# Altium PCB GARY_MIDI_CV_Converter.PcbDoc
Units mm, origin at the board's own origin, x right, y up, seen from the top; angles counter-clockwise.
Board outline 70.2 x 110 mm, 2 copper layers (Top Layer, Bottom Layer); 87 components, 71 nets, 370 pads, 3 vias.
Unrouted connection lines stored in the file: 76.
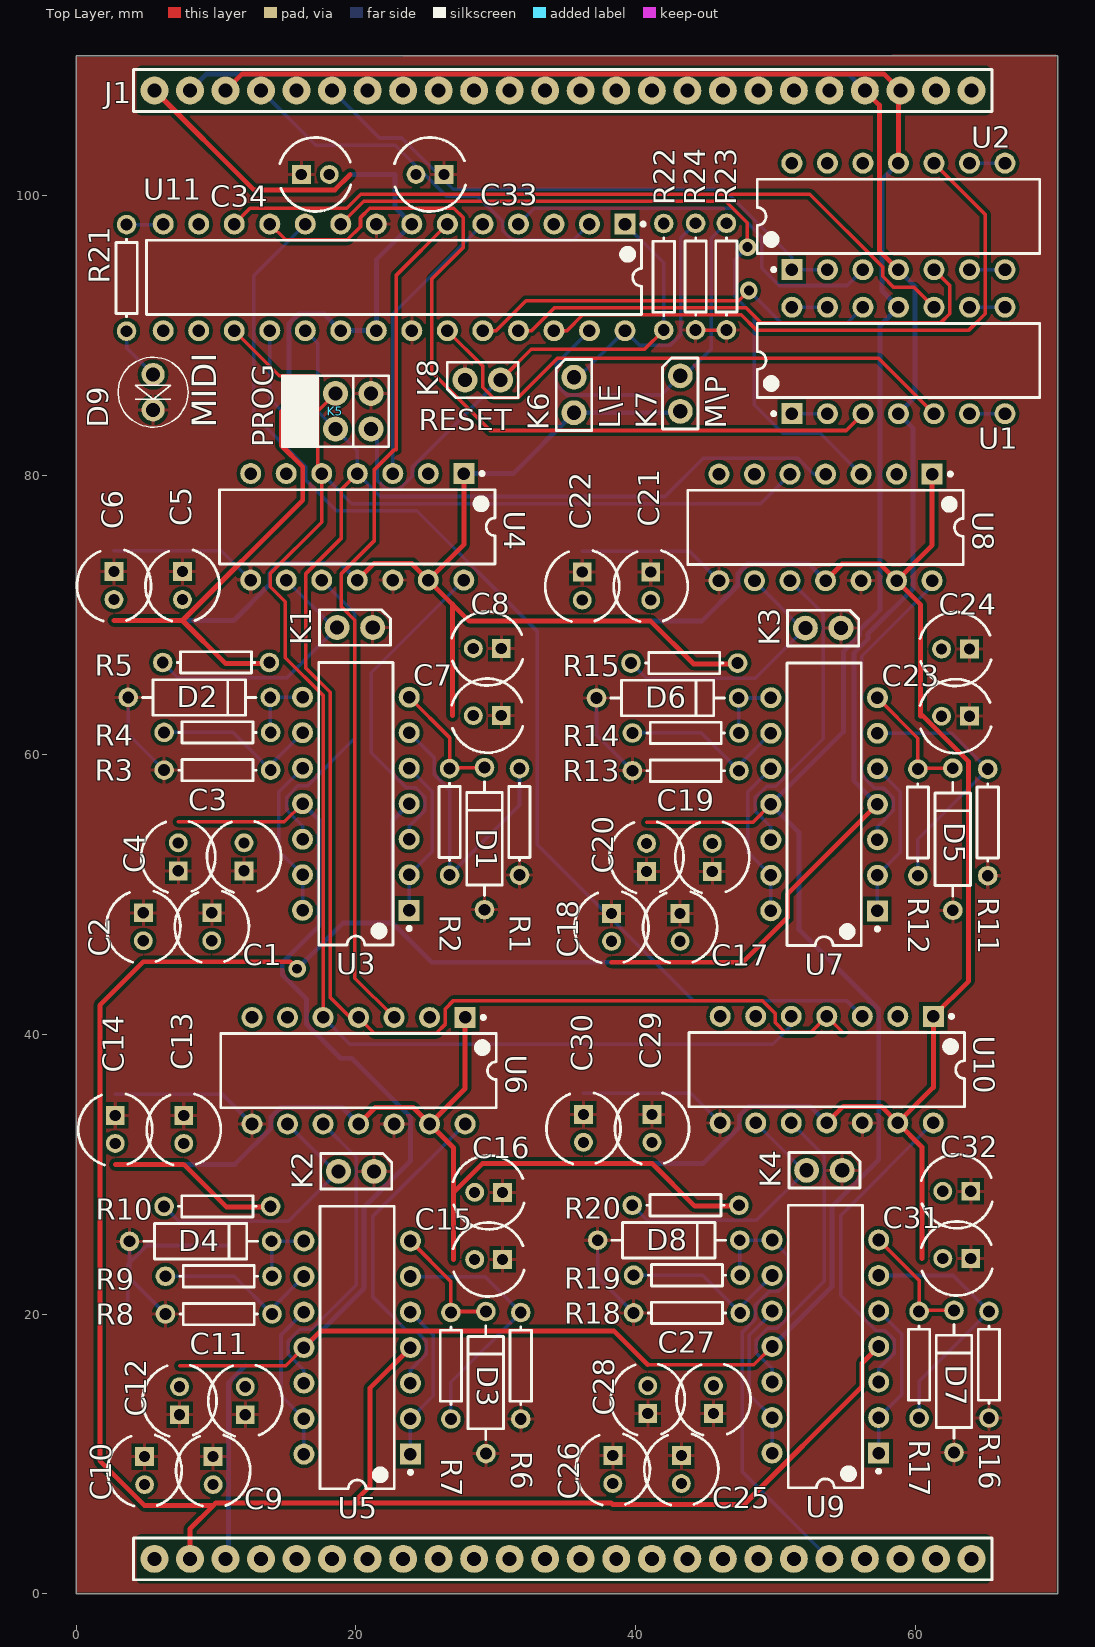
[diagram p0: Top Layer view]
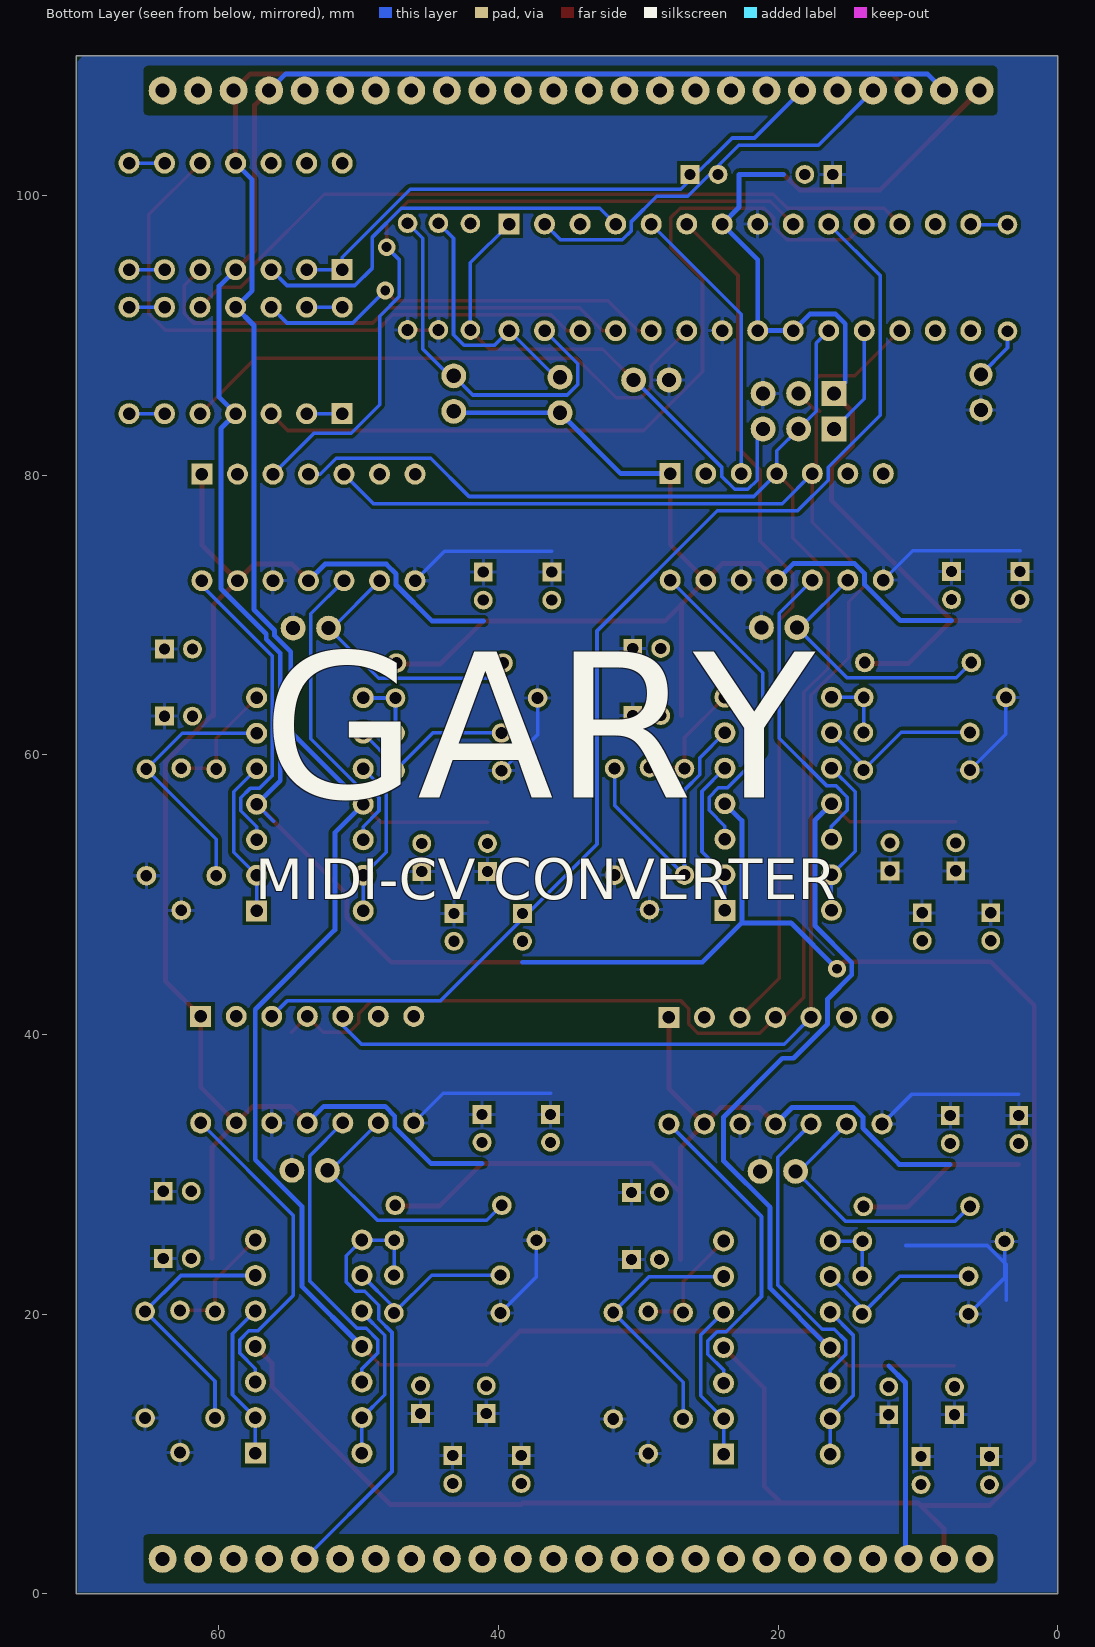
[diagram p1: Bottom Layer view, seen from below]

## Layer stack, top to bottom
Top Solder: solder mask 0.0102, Solder Resist, Dk 3.5
Top Layer: signal copper 0.0356
Dielectric 1: dielectric 0.32, FR-4, Dk 4.8
Bottom Layer: signal copper 0.0356
Bottom Solder: solder mask 0.0102, Solder Resist, Dk 3.5

## Board outline
0,0 70.2,0 70.2,110 0,110

## Design rules (kind name [scope] priority, off if disabled: settings)
Clearance [All] p1: gap=0.254
PolygonConnect [All] p1: connectstyle=Relief reliefconductorwidth=0.254 reliefentries=4 polygonreliefangle="90 Angle" airgapwidth=0.254
RoomDefinition "Top Sheet" [InComponentClass('Top Sheet')] p1: confinementstyle=ConfineIn formatcopy=TRUE lockcomponents=FALSE outline -31.7,-116.5 19.1,-116.5 19.1,-91.1 -31.7,-91.1
RoomDefinition "Digital-Analog Converter_0" [InComponentClass('Digital-Analog Converter_0')] p2: confinementstyle=ConfineIn formatcopy=TRUE lockcomponents=FALSE outline 0.4,43.1 33.3,43.1 33.3,81.4 0.4,81.4
RoomDefinition S1 [InComponentClass('S1')] p3: confinementstyle=ConfineIn formatcopy=TRUE lockcomponents=FALSE outline 0.4,104.3 0.4,82 47.9,82 47.9,104.3
RoomDefinition "Digital-Analog Converter_3" [InComponentClass('Digital-Analog Converter_3')] p4: confinementstyle=ConfineIn formatcopy=TRUE lockcomponents=FALSE outline 33.975,4.284 66.875,4.284 66.875,42.584 33.975,42.584
RoomDefinition "Digital-Analog Converter_2" [InComponentClass('Digital-Analog Converter_2')] p5: confinementstyle=ConfineIn formatcopy=TRUE lockcomponents=FALSE outline 33.887,43.06 66.787,43.06 66.787,81.36 33.887,81.36
RoomDefinition "Digital-Analog Converter_1" [InComponentClass('Digital-Analog Converter_1')] p6: confinementstyle=ConfineIn formatcopy=TRUE lockcomponents=FALSE outline 0.493,4.208 33.393,4.208 33.393,42.508 0.493,42.508
RoomDefinition "Current Buffer" [InComponentClass('Current Buffer')] p7: confinementstyle=ConfineIn formatcopy=TRUE lockcomponents=FALSE outline 70,82 70,103.6 48.2,103.6 48.2,82
RoutingVias [All] p1: holewidth=0.711 width=1.27 viastyle="Through Hole" minholewidth=0.711 minwidth=1.27 maxholewidth=0.711 maxwidth=1.27
SolderMaskExpansion [All] p1: expansion=0.102
Width "Power Rails" [(InNet('-12') OR InNet('+5') OR InNet('+12') OR InNet('+12'))] p1: maxlimit=0.5 minlimit=0.35 preferedwidth=0.35
Width Width_1 [All] p2: maxlimit=0.254 minlimit=0.254 preferedwidth=0.254
29 further rules are at their usual default settings.

## Classes and differential pairs
component class "Current Buffer": U1 U2
component class "Digital-Analog Converter_0": C1 C2 C3 C4 C5 C6 C7 C8 D1 D2 K1 R1 R2 R3 R4 R5 U3 U4
component class "Digital-Analog Converter_1": C9 C10 C11 C12 C13 C14 C15 C16 D3 D4 K2 R6 R7 R8 R9 R10 U5 U6
component class "Digital-Analog Converter_2": C17 C18 C19 C20 C21 C22 C23 C24 D5 D6 K3 R11 R12 R13 R14 R15 U7 U8
component class "Digital-Analog Converter_3": C25 C26 C27 C28 C29 C30 C31 C32 D7 D8 K4 R16 R17 R18 R19 R20 U9 U10
component class S1: C33 C34 D9 K5 K6 K7 K8 R21 R22 R23 R24 U11
channel class DAC: "Digital-Analog Converter_0" "Digital-Analog Converter_1" "Digital-Analog Converter_2" "Digital-Analog Converter_3"
net class Power: +5 +12 -12
component class "Top Sheet": J1

## Components (designator, comment, footprint, x,y, rotation, side; value= is the part's Value field where it differs from the comment)
C1 "Cap" "CAP 5X11" 9.7,47.7 r270 top
C2 "Cap" "CAP 5X11" 4.8,47.7 r270 top
C3 "Cap" "CAP 5X11" 12,52.7 r90 top
C4 "Cap" "CAP 5X11" 7.3,52.7 r90 top
C5 "Cap" "CAP 5X11" 7.6,72.1 r270 top (schematic designator C7)
C6 "Cap" "CAP 5X11" 2.7,72.1 r270 top (schematic designator C8)
C7 "Cap" "CAP 5X11" 29.4,62.8 r180 top (schematic designator C9)
C8 "Cap" "CAP 5X11" 29.4,67.6 r180 top (schematic designator C10)
C9 "Cap" "CAP 5X11" 9.793,8.808 r270 top (schematic designator C1)
C10 "Cap" "CAP 5X11" 4.893,8.808 r270 top (schematic designator C2)
C11 "Cap" "CAP 5X11" 12.093,13.808 r90 top (schematic designator C3)
C12 "Cap" "CAP 5X11" 7.393,13.808 r90 top (schematic designator C4)
C13 "Cap" "CAP 5X11" 7.693,33.208 r270 top (schematic designator C7)
C14 "Cap" "CAP 5X11" 2.793,33.208 r270 top (schematic designator C8)
C15 "Cap" "CAP 5X11" 29.493,23.908 r180 top (schematic designator C9)
C16 "Cap" "CAP 5X11" 29.493,28.708 r180 top (schematic designator C10)
C17 "Cap" "CAP 5X11" 43.187,47.66 r270 top (schematic designator C1)
C18 "Cap" "CAP 5X11" 38.287,47.66 r270 top (schematic designator C2)
C19 "Cap" "CAP 5X11" 45.487,52.66 r90 top (schematic designator C3)
C20 "Cap" "CAP 5X11" 40.787,52.66 r90 top (schematic designator C4)
C21 "Cap" "CAP 5X11" 41.087,72.06 r270 top (schematic designator C7)
C22 "Cap" "CAP 5X11" 36.187,72.06 r270 top (schematic designator C8)
C23 "Cap" "CAP 5X11" 62.887,62.76 r180 top (schematic designator C9)
C24 "Cap" "CAP 5X11" 62.887,67.56 r180 top (schematic designator C10)
C25 "Cap" "CAP 5X11" 43.275,8.884 r270 top (schematic designator C1)
C26 "Cap" "CAP 5X11" 38.375,8.884 r270 top (schematic designator C2)
C27 "Cap" "CAP 5X11" 45.575,13.884 r90 top (schematic designator C3)
C28 "Cap" "CAP 5X11" 40.875,13.884 r90 top (schematic designator C4)
C29 "Cap" "CAP 5X11" 41.175,33.284 r270 top (schematic designator C7)
C30 "Cap" "CAP 5X11" 36.275,33.284 r270 top (schematic designator C8)
C31 "Cap" "CAP 5X11" 62.975,23.984 r180 top (schematic designator C9)
C32 "Cap" "CAP 5X11" 62.975,28.784 r180 top (schematic designator C10)
C33 "Cap" "CAP 5X11" 25.3,101.5 r180 top (schematic designator C11)
C34 "Cap" "CAP 5X11" 17.1,101.5 r0 top (schematic designator C12)
D1 "D Zener" DIODE-0.4 29.2,54 r90 top
D2 "D Zener" DIODE-0.4 8.8,64.1 r0 top
D3 "D Zener" DIODE-0.4 29.293,15.108 r90 top (schematic designator D1)
D4 "D Zener" DIODE-0.4 8.893,25.208 r0 top (schematic designator D2)
D5 "D Zener" DIODE-0.4 62.687,53.96 r90 top (schematic designator D1)
D6 "D Zener" DIODE-0.4 42.287,64.06 r0 top (schematic designator D2)
D7 "D Zener" DIODE-0.4 62.775,15.184 r90 top (schematic designator D1)
D8 "D Zener" DIODE-0.4 42.375,25.284 r0 top (schematic designator D2)
D9 "GREEN" LED-5MM-GREEN 5.5,87.2 r270 top (schematic designator D3)
J1 "Backplane Connector" "MIDI-CV CONVERTER MODULE" 5.6,2.5 r0 top
K1 "MIDI RESET" JMPR2 21.2,69.1 r270 top
K2 "MIDI RESET" JMPR2 21.293,30.208 r270 top (schematic designator K1)
K3 "MIDI RESET" JMPR2 54.687,69.06 r270 top (schematic designator K1)
K4 "MIDI RESET" JMPR2 54.775,30.284 r270 top (schematic designator K1)
K5 "PROG" HEADER-2X3 16,83.3 r90 top (schematic designator K3)
K6 "L\E" JMPR2 35.6,87 r0 top (schematic designator K4)
K7 "M\P" JMPR2 43.2,87.1 r0 top (schematic designator K2)
K8 "RESET" JMPR2 27.8,86.8 r90 top (schematic designator K5)
R1 "Res1" AXIAL-0.3 31.7,55.2 r270 top
R2 "Res1" AXIAL-0.3 26.7,55.2 r270 top
R3 "Res1" AXIAL-0.3 10.1,58.9 r180 top (schematic designator R5)
R4 "Res1" AXIAL-0.3 10.1,61.6 r180 top (schematic designator R6)
R5 "Res1" AXIAL-0.3 10,66.6 r0 top (schematic designator R7)
R6 "Res1" AXIAL-0.3 31.793,16.308 r270 top (schematic designator R1)
R7 "Res1" AXIAL-0.3 26.793,16.308 r270 top (schematic designator R2)
R8 "Res1" AXIAL-0.3 10.193,20.008 r180 top (schematic designator R5)
R9 "Res1" AXIAL-0.3 10.193,22.708 r180 top (schematic designator R6)
R10 "Res1" AXIAL-0.3 10.093,27.708 r0 top (schematic designator R7)
R11 "Res1" AXIAL-0.3 65.187,55.16 r270 top (schematic designator R1)
R12 "Res1" AXIAL-0.3 60.187,55.16 r270 top (schematic designator R2)
R13 "Res1" AXIAL-0.3 43.587,58.86 r180 top (schematic designator R5)
R14 "Res1" AXIAL-0.3 43.587,61.56 r180 top (schematic designator R6)
R15 "Res1" AXIAL-0.3 43.487,66.56 r0 top (schematic designator R7)
R16 "Res1" AXIAL-0.3 65.275,16.384 r270 top (schematic designator R1)
R17 "Res1" AXIAL-0.3 60.275,16.384 r270 top (schematic designator R2)
R18 "Res1" AXIAL-0.3 43.675,20.084 r180 top (schematic designator R5)
R19 "Res1" AXIAL-0.3 43.675,22.784 r180 top (schematic designator R6)
R20 "Res1" AXIAL-0.3 43.575,27.784 r0 top (schematic designator R7)
R21 "Res1" AXIAL-0.3 3.6,94.1 r90 top (schematic designator R11)
R22 "Res1" AXIAL-0.3 42.016,94.18 r90 top (schematic designator R3)
R23 "Res1" AXIAL-0.3 46.5,94.2 r90 top (schematic designator R4)
R24 "Res1" AXIAL-0.3 44.3,94.2 r90 top (schematic designator R8)
U1 "LM148J" J14A 58.8,88.2 r90 top (schematic designator U3)
U2 "LM148J" J14A 58.8,98.5 r90 top (schematic designator U4)
U3 "LM148J" J14A 20,56.5 r180 top (schematic designator U1)
U4 "MCP4922-E/P" PDIP300-P14 20.1,76.3 r270 top (schematic designator U2)
U5 "LM148J" J14A 20.093,17.608 r180 top (schematic designator U1)
U6 "MCP4922-E/P" PDIP300-P14 20.193,37.408 r270 top (schematic designator U2)
U7 "LM148J" J14A 53.487,56.46 r180 top (schematic designator U1)
U8 "MCP4922-E/P" PDIP300-P14 53.587,76.26 r270 top (schematic designator U2)
U9 "LM148J" J14A 53.575,17.684 r180 top (schematic designator U1)
U10 "MCP4922-E/P" PDIP300-P14 53.675,37.484 r270 top (schematic designator U2)
U11 "ATmega328-PU" 28P3 22.733,94.139 r270 top (schematic designator U5)

## Footprints (in the part's own frame and the unit in brackets; to place one, negate y for a bottom-side part, rotate by r counter-clockwise, add the part's x,y. Pads: shape width x height; smd on the part's side, far side on the other; paste and mask are expansions set on the pad)
28P3 [mm] "DIP, 28-Leads, Row Spacing 7.62mm, Pitch 2.54mm, Body 34.67x7.3mm"
  rect 1.5x1.5 hole 0.9: 1(-3.81,16.51)
  round 1.5 hole 0.9: 2(-3.81,13.97) 3(-3.81,11.43) 4(-3.81,8.89) 5(-3.81,6.35) 6(-3.81,3.81) 7(-3.81,1.27) 8(-3.81,-1.27) 9(-3.81,-3.81) 10(-3.81,-6.35) 11(-3.81,-8.89) 12(-3.81,-11.43) 13(-3.81,-13.97) 14(-3.81,-16.51) 15(3.81,-16.51) 16(3.81,-13.97) 17(3.81,-11.43) 18(3.81,-8.89) 19(3.81,-6.35) 20(3.81,-3.81) 21(3.81,-1.27) 22(3.81,1.27) 23(3.81,3.81) 24(3.81,6.35) 25(3.81,8.89) 26(3.81,11.43) 27(3.81,13.97) 28(3.81,16.51)
  silkscreen extent -3.93,-17.7 2.65,17.94, body extent -3.6,-17.65 3.6,17.65, height 4.58
AXIAL-0.3 [mm] "Axial Device, Thru-Hole; 2 Leads; 0.3 in Pin Spacing"
  round 1.4 hole 0.85: 1(-3.81,0) 2(3.81,0)
  silkscreen extent -2.77,-0.76 2.77,0.76, body extent -4.07,-0.8 4.08,0.8, height 1.95
"CAP 5X11" [mm]
  rect 1.35x1.35 hole 0.8: 1(-1,0)
  round 1.35 hole 0.8: 2(1,0)
  silkscreen extent -2.54,-2.65 2.54,2.65, body extent -2.5,-2.5 2.5,2.5, height 11
DIODE-0.4 [mm] "Diode, Thru-Hole; 2 Leads; 0.4 in Pin Spacing"
  round 1.4 hole 0.85: 1(-5.08,0) 2(5.08,0)
  silkscreen extent -4.06,-1.27 4.06,1.27
HEADER-2X3 [mil]
  rect 70x70 hole 40: 1(0,0) 2(100,0)
  round 70 hole 40: 3(0,-100) 4(100,-100) 5(0,-200) 6(100,-200)
  silkscreen extent -50,-250 150,50, body extent -50,-250 150,50, height 470
J14A [mm] "DIP, 14-Pin, Row Spacing 7.62 mm, Pitch 2.54 mm"
  rect 1.5x1.5 hole 0.9: 1(-3.81,7.62)
  round 1.5 hole 0.9: 2(-3.81,5.08) 3(-3.81,2.54) 4(-3.81,0) 5(-3.81,-2.54) 6(-3.81,-5.08) 7(-3.81,-7.62) 8(3.81,-7.62) 9(3.81,-5.08) 10(3.81,-2.54) 11(3.81,0) 12(3.81,2.54) 13(3.81,5.08) 14(3.81,7.62)
  silkscreen extent -3.93,-10.1 2.65,10.1, body extent -3.6,-10.1 3.6,10.1, height 5.08
JMPR2 [mil]
  round 70 hole 40: 1(0,0) 2(0,-100)
  silkscreen extent -50,-150 50,50, body extent -50,-150 50,50, height 300
LED-5MM-GREEN [mil]
  round 65 hole 40: A(0,0) K(100,0)
  silkscreen extent -48,-98 148,98, body extent -54,-105 155,105, height 370
"MIDI-CV CONVERTER MODULE" [mm]
  round 2 hole 1: 0(0,0) 0(0,105) 1(2.54,0) 1(2.54,105) 2(5.08,0) 2(5.08,105) 3(7.62,0) 3(7.62,105) 4(10.16,0) 4(10.16,105) 5(12.7,0) 5(12.7,105) 6(15.24,0) 6(15.24,105) 7(17.78,0) 7(17.78,105) 8(20.32,0) 8(20.32,105) 9(22.86,0) 9(22.86,105) 10(25.4,0) 10(25.4,105) 11(27.94,0) 11(27.94,105) 12(30.48,0) 12(30.48,105) 13(33.02,0) 13(33.02,105) 14(35.56,0) 14(35.56,105) 15(38.1,0) 15(38.1,105) 16(40.64,0) 16(40.64,105) 17(43.18,0) 17(43.18,105) 18(45.72,0) 18(45.72,105) 19(48.26,0) 19(48.26,105) 20(50.8,0) 20(50.8,105) 21(53.34,0) 21(53.34,105) 22(55.88,0) 22(55.88,105) 23(58.42,0) 23(58.42,105)
  silkscreen extent -1.5,-1.5 59.9,106.5, body extent -1.27,-1.27 59.69,106.27, height 3.2
PDIP300-P14 [mm] "DIP, 14-Leads, Row Spacing 7.62mm, Pitch 2.54mm, Body 19.2x6.6mm"
  rect 1.5x1.5 hole 0.9: 1(-3.81,7.62)
  round 1.5 hole 0.9: 2(-3.81,5.08) 3(-3.81,2.54) 4(-3.81,0) 5(-3.81,-2.54) 6(-3.81,-5.08) 7(-3.81,-7.62) 8(3.81,-7.62) 9(3.81,-5.08) 10(3.81,-2.54) 11(3.81,0) 12(3.81,2.54) 13(3.81,5.08) 14(3.81,7.62)
  silkscreen extent -3.93,-9.85 2.65,9.85, body extent -3.55,-9.85 3.55,9.85, height 5.33

## Part data
C1 C2 C3 C4 C5 C6 C7 C8 C9 C10 C11 C12 C13 C14 C15 C16 C17 C18 C19 C20 C21 C22 C23 C24 C25 C26 C27 C28 C29 C30 C31 C32 C33 C34: "Capacitor"
D1 D2 D3 D4 D5 D6 D7 D8: "Zener Diode"
D9: library part LED-GREEN-5MM, "LED-GREEN-5MM"
J1: library part MIDI_CV_Converter
K1 K2 K3 K4 K6 K7 K8: library part JMPR2, "JMPR2 OPEN BY DEFAULT"
K5: library part HEADER-2X3
R1 R2 R3 R4 R5 R6 R7 R8 R9 R10 R11 R12 R13 R14 R15 R16 R17 R18 R19 R20 R21 R22 R23 R24: "Resistor"
U1 U2 U3 U5 U7 U9: "Series Quad 741 Op Amp, 14-pin CerDIP"
U4 U6 U8 U10: "12-Bit DAC with SPI Interface, 14-Pin PDIP, Extended Temperature"
U11: "8-bit AVR Microcontroller, 32KB Flash, 1KB EEPROM, 2KB SRAM, 28-pin PDIP, Industrial Grade (-40°C to 85°C)"

## Via types
v1: diameter 1.27, hole 0.711, Top Layer to Bottom Layer, 3 vias

## Nets (pads, with @x,y where several pads share a name; then routed paths per layer and width w, separated by ;. In a path a pad name is that pad's centre, name@x,y a point inside that pad or via, vN(x,y) a via of type N, cw(c..) or ccw(c..) an arc to the next point about the centre after c; other vN are vias at no path point)
+5: C5.2 C6.2 C7.2 C8.2 C13.2 C14.2 C15.2 C16.2 C21.2 C22.2 C23.2 C24.2 C29.2 C30.2 C31.2 C32.2 C33.2 C34.2 J1.0 K5.2 K6.2 K7.2 R5.2 R10.2 R15.2 R20.2 R22.2 U4.1 U4.11 U4.13 U6.1 U6.11 U6.13 U8.1 U8.11 U8.13 U10.1 U10.11 U10.13 U11.7 U11.20 U11.21 | length 338.6
  Top Layer w0.35: 2.7,69.6 7.6,69.6 ; 2.793,30.708 7.693,30.708 10.753,27.648 13.843,27.648 R10.2 ; J1.0@5.6,107.5 12.704,100.396 18.496,100.396 19.6,101.5 ; R5.2 13.75,66.54 10.66,66.54 7.6,69.6 ; K5.2 14.682,84.522 14.682,82.115 16.199,80.598 16.199,78.199 7.6,69.6 ; U4.11 21.279,73.669 24.001,73.669 U4.13 ; U6.11 21.372,34.777 24.094,34.777 U6.13 ; 26.9,62.8 26.9,67.6 26.9,70.77 ; 26.993,23.908 26.993,28.708 ; U4.1 27.72,75.03 U4.13 ; U6.1 27.813,36.138 U6.13 ; R15.2 47.237,66.5 44.147,66.5 41.087,69.56 36.187,69.56 28.11,69.56 26.9,70.77 ; R20.2 47.325,27.724 44.235,27.724 41.175,30.784 36.275,30.784 29.069,30.784 26.993,28.708 ; U8.11 54.766,73.629 57.488,73.629 U8.13 ; U10.11 54.854,34.853 57.576,34.853 U10.13 ; 60.475,23.984 60.475,28.784 60.475,31.954 U10.13 ; U8.1 61.207,74.99 U8.13 ; U4.13 26.9,70.77 ; U6.13 26.993,31.878 26.993,28.708 ; U8.13 60.387,70.73 60.387,67.56 60.387,62.76 60.564,62.76 63.816,59.508 63.816,43.815 U10.1 61.295,36.214 U10.13
  Bottom Layer w0.35: 7.6,69.6 11.257,69.6 13.841,72.184 13.841,72.978 14.532,73.669 18.921,73.669 U4.11 ; 7.693,30.708 11.35,30.708 13.934,33.292 13.934,34.086 14.625,34.777 19.014,34.777 U6.11 ; K5.2 15.204,86.636 15.204,90.818 15.895,91.508 17.744,91.508 U11.20 U11.21 21.463,95.409 U11.7 22.8,99.152 22.8,101.5 19.6,101.5 ; U4.1 31.25,80.11 K6.2 43.1,84.46 K7.2 ; 41.087,69.56 44.744,69.56 47.328,72.144 47.328,72.938 48.019,73.629 52.408,73.629 U8.11 ; 41.175,30.784 44.832,30.784 47.416,33.368 47.416,34.162 48.107,34.853 52.496,34.853 U10.11
+12: C1.2 C2.2 C9.2 C10.2 C17.2 C18.2 C25.2 C26.2 J1.1 J1.20 U1.4 U2.4 U3.4 U5.4 U7.4 U9.4 | length 293.8
  Top Layer w0.35: J1.1@8.14,2.5 8.14,4.655 9.793,6.308 ; v1(15.8,44.7) 15.3,45.2 9.7,45.2 4.8,45.2 1.689,42.089 1.689,9.512 4.893,6.308 9.793,6.308 ; U5.4 21,14.705 21,7.7 19.8,6.5 ; 38.287,45.16 43.187,45.16 47.664,45.16 50.856,48.352 50.856,50.019 U7.4 ; J1.20@56.4,107.5 57.439,106.461 57.439,96.051 U2.4 ; U9.4 56.206,16.505 56.206,14.838 47.752,6.384 38.375,6.384 38.259,6.5 19.8,6.5 ; 9.793,6.308 9.985,6.5 19.8,6.5
  Bottom Layer w0.254: 56.087,55.25 U7.4
  Bottom Layer w0.35: J1.1@8.14,107.5 9.331,108.691 55.209,108.691 J1.20@56.4,107.5 ; v1(15.8,44.7) 19.083,47.983 22.6,47.983 ; U3.4 22.6,55.29 22.6,47.983 ; 38.287,45.16 25.423,45.16 22.6,47.983 ; U7.4 55.61,58.147 55.61,67.265 56.609,68.264 56.609,68.638 59.846,71.875 59.846,83.344 U1.4 59.979,85.569 59.979,93.511 U2.4
-12: C3.2 C4.2 C11.2 C12.2 C19.2 C20.2 C27.2 C28.2 J1.2 J1.21 U1.11 U2.11 U3.11 U5.11 U7.11 U9.11 | length 276.3
  Top Layer w0.254: 7.3,55.2 12,55.2 14.89,55.2 U3.11 ; 7.393,16.308 14.983,16.308 U5.11 ; 40.787,55.16 48.377,55.16 U7.11 ; 40.875,16.384 48.465,16.384 U9.11
  Top Layer w0.35: J1.2@10.68,107.5 11.871,108.691 57.749,108.691 58.94,107.5 58.8,107.36 U2.11 ; U5.11 17.462,18.787 38.472,18.787 40.875,16.384
  Bottom Layer w0.35: J1.2@10.68,2.5 10.897,2.717 10.897,15.112 12.093,16.308 ; U3.11 17.369,55.321 17.369,47.774 14.736,45.141 14.736,44.259 16.474,42.521 16.474,40.73 18.904,38.3 19.698,38.3 23.912,34.086 23.912,30.963 20.579,27.63 20.579,21.848 16.339,17.608 U5.11 ; U9.11 54.061,21.98 54.061,27.706 57.394,31.039 57.394,41.782 51.7,47.476 51.7,54.437 U7.11 54.859,61.642 54.859,67.368 56.005,68.514 56.005,68.889 57.488,70.372 57.488,90.698 U1.11 57.621,93.189 57.621,101.131 U2.11
"CHIP_SEL_Digital-Analog Converter_0": U4.3 U11.5 | length 20.5
  Bottom Layer w0.254: U4.3 22.64,91.506 U11.5
"CHIP_SEL_Digital-Analog Converter_1": U6.3 U11.6 | length 61.5
  Top Layer w0.254: U6.3 19.93,44.021 19.93,69.626 18.969,70.587 18.969,72.959 21.3,75.289 21.3,80.369 22.731,81.8 22.872,81.8 22.872,94.278 U11.6
"CHIP_SEL_Digital-Analog Converter_2": U8.3 U11.9 | length 54.1
  Top Layer w0.254: U11.9 20.562,99.588 46.45,99.588 48,98.039 v1(48,96.3)
  Bottom Layer w0.254: v1(48,96.3) 47.084,95.384 47.084,92.779 48.5,91.363 48.5,85.031 50.531,83 53.197,83 U8.3
"CHIP_SEL_Digital-Analog Converter_3": U10.3 U11.10 | length 86
  Bottom Layer w0.254: U11.10 12.712,94.278 12.712,84.271 16.429,80.554 16.429,79.642 18.616,77.455 24.355,77.455 32.956,68.854 32.956,53.602 44.133,42.425 55.084,42.425 U10.3
GATE: U2.3 U11.4 | length 29.2
  Bottom Layer w0.254: U11.4 32.765,99.091 46.948,99.091 49.016,97.023 49.016,94.815 50.272,93.559 55.129,93.559 U2.3
GND: C1.1 C2.1 C3.1 C4.1 C5.1 C6.1 C7.1 C8.1 C9.1 C10.1 C11.1 C12.1 C13.1 C14.1 C15.1 C16.1 C17.1 C18.1 C19.1 C20.1 C21.1 C22.1 C23.1 C24.1 C25.1 C26.1 C27.1 C28.1 C29.1 C30.1 C31.1 C32.1 C33.1 C34.1 D1.1 D2.1 D3.1 D4.1 D5.1 D6.1 D7.1 D8.1 D9.K J1.4 J1.22 J1.23 K1.1 K2.1 K3.1 K4.1 K5.6 K8.1 R1.2 R3.2 R6.2 R8.2 R11.2 R13.2 R16.2 R18.2 R23.1 R24.1 U4.8 U4.12 U6.8 U6.12 U8.8 U8.12 U10.8 U10.12 U11.8 U11.22 | length 80.2
  Top Layer w0.254: R24.1@44.248,90.37 R23.1@46.48,90.37
  Bottom Layer w0.254: 2.7,74.6 7.6,74.6 10.37,74.6 U4.8 ; 2.793,35.708 7.693,35.708 10.463,35.708 U6.8 ; 3.693,21.008 3.693,23.548 5.053,24.908 10.883,24.908 ; D2.1 3.72,61.47 R3.2 ; D4.1 3.813,22.578 R8.2 ; 36.187,74.56 41.087,74.56 43.857,74.56 U8.8 ; 36.275,35.784 41.175,35.784 43.945,35.784 U10.8 ; D6.1 37.207,61.43 R13.2 ; D8.1 37.295,22.654 R18.2
GPIO_0: U1.5 U11.23 | length 40.5
  Top Layer w0.254: U11.23 29.07,87.802 29.07,86.274 29.814,85.53 31.59,85.53 34.43,88.37 57.36,88.37 U1.5
GPIO_1: U1.12 U11.24 | length 29.8
  Top Layer w0.254: U11.24 30.024,90.329 32.171,92.476 47.376,92.476 v1(48.1,93.2)
  Bottom Layer w0.254: v1(48.1,93.2) 50.421,90.879 55.129,90.879 U1.12
GPIO_2: U2.5 U11.25 | length 35.9
  Top Layer w0.254: U11.25 32.564,90.329 34.203,91.968 47.9,91.968 48.989,90.879 55.571,90.879 56.728,90.879 61.808,90.879 62.471,91.542 62.471,93.559 U2.5
GPIO_3: U2.10 U11.26 | length 44.5
  Top Layer w0.254: U11.26 35.104,90.329 36.235,91.46 47.56,91.46 48.65,90.371 63.84,90.371 65.011,91.542 65.011,98.639 U2.10
LIN/EXPO: K6.1 R24.2 U11.28 | length 18.2
  Bottom Layer w0.254: K6.1 35.914,87 U11.28 40.283,89.289 42.464,89.289 43.219,90.045 43.219,96.929 R24.2
MISO: K5.1 U11.18 | length 7.9
  Bottom Layer w0.254: U11.18 13.843,85.457 K5.1
MONO/POLY: K7.1 R23.2 U11.27 | length 27.5
  Top Layer w0.254: R23.2@46.48,97.566 R23.2@46.48,97.99
  Bottom Layer w0.254: U11.27 34.33,87.956 34.33,86.474 35.074,85.73 41.83,85.73 K7.1 43.5,87.1 45.419,89.019 45.419,96.929 R23.2
MOSI: K5.4 U4.5 U6.5 U8.5 U10.5 U11.17 | length 129.1
  Top Layer w0.254: U11.17 14.522,87.11 17.047,87.11 17.27,86.887 17.27,84.793 17.047,84.57 17.27,84.57 ; U4.5@17.27,80.4 17.27,84.57 ; U4.5 17.56,76.63 13.889,72.959 13.889,72.011 14.961,70.939 14.961,66.949 17.653,64.257 U6.5 ; K5.4 17.27,84.57 ; U10.5@50.877,41.552 U10.5
  Bottom Layer w0.254: U4.5 19.707,77.963 48.94,77.963 U8.5 ; U6.5 19.563,39.308 49.8,39.308 51.135,40.643 U10.5
NetD1_2: D1.2 J1.12 R2.1 U3.7 | length 8.8
  Top Layer w0.254: U3.7 26.7,61.23 R2.1 26.77,59.08 D1.2
NetD2_2: D2.2 J1.13 R4.1 U3.8 | length 4.8
  Bottom Layer w0.254: R4.1 13.88,61.63 D2.2 16.17,64.1 U3.8
NetD3_2: D3.2 J1.14 R7.1 U5.7 | length 8.8
  Top Layer w0.254: U5.7 26.793,22.338 R7.1 26.863,20.188 D3.2
NetD4_2: D4.2 J1.15 R9.1 U5.8 | length 4.8
  Bottom Layer w0.254: R9.1 13.973,22.738 D4.2 16.263,25.208 U5.8
NetD5_2: D5.2 J1.16 R12.1 U7.7 | length 8.8
  Top Layer w0.254: U7.7 60.187,61.19 R12.1 60.257,59.04 D5.2
NetD6_2: D6.2 J1.17 R14.1 U7.8 | length 4.8
  Bottom Layer w0.254: R14.1 47.367,61.59 D6.2 49.657,64.06 U7.8
NetD7_2: D7.2 J1.18 R17.1 U9.7 | length 8.8
  Top Layer w0.254: U9.7 60.275,22.414 R17.1 60.345,20.264 D7.2
NetD8_2: D8.2 J1.19 R19.1 U9.8 | length 32.4
  Bottom Layer w0.254: R19.1 47.455,22.814 D8.2 49.745,25.284 U9.8 50.896,24.173 50.896,22.296 50.234,21.633 49.575,21.633 48.566,20.625 48.566,19.636 47.618,18.688 47.618,8.742 J1.19@53.86,2.5
NetD9_A: D9.A R21.1 | length 3.9
  Bottom Layer w0.254: R21.1 3.6,89.1 D9.A
NetJ1_3: J1.3 U11.2 | length 28.8
  Bottom Layer w0.254: J1.3@13.22,107.5 17.12,103.6 22.812,103.6 26.476,99.936 28.696,99.936 30.492,98.14 30.492,97.481 31.155,96.818 35.572,96.818 U11.2
NetJ1_5: J1.5 U2.1 U2.2 | length 41.2
  Bottom Layer w0.254: J1.5@18.3,107.5 21.692,104.108 23.292,104.108 26.956,100.444 46.313,100.444 51.18,95.577 U2.1 U2.2
NetJ1_6: J1.6 U1.1 U1.2 | length 2.5
  Bottom Layer w0.254: U1.1 U1.2
NetJ1_7: J1.7 U1.8 U1.9 | length 2.5
  Bottom Layer w0.254: U1.9 U1.8
NetJ1_8: J1.8
NetJ1_9: J1.9
NetJ1_10: J1.10
NetJ1_11: J1.11
NetK1_2: K1.2 R5.1 U4.9 | length 19.4
  Bottom Layer w0.254: R5.1 7.271,65.519 15.079,65.519 K1.2 18.41,69.1 U4.9
NetK2_2: K2.2 R10.1 U6.9 | length 19.4
  Bottom Layer w0.254: R10.1 7.364,26.627 15.172,26.627 K2.2 18.503,30.208 U6.9
NetK3_2: K3.2 R15.1 U8.9 | length 19.4
  Bottom Layer w0.254: R15.1 40.758,65.479 48.566,65.479 K3.2 51.897,69.06 U8.9
NetK4_2: K4.2 R20.1 U10.9 | length 19.4
  Bottom Layer w0.254: R20.1 40.846,26.703 48.654,26.703 K4.2 51.985,30.284 U10.9
NetR1_1: R1.1 R2.2 U3.6 | length 21.1
  Bottom Layer w0.254: U3.6 25.619,59.771 25.619,58.562 26.7,57.481 R2.2 31.7,56.39 R1.1
NetR3_1: R3.1 R4.2 U3.9 | length 12.4
  Bottom Layer w0.254: R4.2 11.21,61.6 R3.1 13.91,59.3 U3.9
NetR6_1: R6.1 R7.2 U5.6 | length 18.6
  Bottom Layer w0.254: U5.6 29.223,22.688 R6.1 26.793,15.118 R7.2
NetR8_1: R8.1 R9.2 U5.9 | length 12.4
  Bottom Layer w0.254: R9.2 11.303,22.708 R8.1 14.003,20.408 U5.9
NetR11_1: R11.1 R12.2 U7.6 | length 18.6
  Bottom Layer w0.254: U7.6 62.617,61.54 R11.1 60.187,53.97 R12.2
NetR13_1: R13.1 R14.2 U7.9 | length 12.4
  Bottom Layer w0.254: R14.2 44.697,61.56 R13.1 47.397,59.26 U7.9
NetR16_1: R16.1 R17.2 U9.6 | length 18.6
  Bottom Layer w0.254: U9.6 62.705,22.764 R16.1 60.275,15.194 R17.2
NetR18_1: R18.1 R19.2 U9.9 | length 12.4
  Bottom Layer w0.254: R19.2 44.785,22.784 R18.1 47.485,20.484 U9.9
NetR21_2: R21.2 U11.14 | length 2.6
  Bottom Layer w0.254: R21.2 6.184,97.91 U11.14
NetU1_6: U1.6 U1.7 | length 2.5
  Bottom Layer w0.254: U1.6 U1.7
NetU1_13: U1.13 U1.14 | length 2.5
  Bottom Layer w0.254: U1.14 U1.13
NetU2_6: U2.6 U2.7 | length 2.5
  Bottom Layer w0.254: U2.6 U2.7
NetU2_8: U2.8 U2.9 | length 2.5
  Bottom Layer w0.254: U2.9 U2.8
NetU3_1: U3.1 U3.2 U3.5 | length 11.5
  Bottom Layer w0.254: U3.1 U3.2 25.449,53.059 25.449,57.401 U3.5
NetU3_3: U3.3 U4.14 | length 23.7
  Bottom Layer w0.254: U3.3 23.81,54.901 24.941,56.032 24.941,56.969 24.279,57.631 23.62,57.631 21.1,60.151 21.1,65.87 U4.14
NetU3_10: U3.10 U3.13 U3.14 | length 11.7
  Bottom Layer w0.254: U3.14@16.11,48.8 U3.14 U3.13 14.5,53.11 14.5,57.35 U3.10
NetU3_12: U3.12 U4.10 | length 22.4
  Bottom Layer w0.254: U3.12 16.19,54.901 15.059,56.032 15.059,56.969 15.891,57.8 16.55,57.8 19.93,61.181 19.93,70.12 U4.10
NetU5_1: U5.1 U5.2 U5.5 | length 11.5
  Bottom Layer w0.254: U5.1 U5.2 25.542,14.167 25.542,18.509 U5.5
NetU5_3: U5.3 U6.14 | length 23.7
  Bottom Layer w0.254: U5.3 23.903,16.009 25.034,17.14 25.034,18.077 24.372,18.739 23.713,18.739 21.193,21.259 21.193,26.978 U6.14
NetU5_10: U5.10 U5.13 U5.14 | length 11.6
  Bottom Layer w0.254: U5.14@16.203,9.908 U5.14 U5.13 14.644,14.167 14.644,18.509 U5.10
NetU5_12: U5.12 U6.10 | length 22.5
  Bottom Layer w0.254: U5.12 16.283,16.009 15.152,17.14 15.152,18.077 15.984,18.908 16.853,18.908 20.023,22.078 20.023,31.228 U6.10
NetU7_1: U7.1 U7.2 U7.5 | length 11.5
  Bottom Layer w0.254: U7.1 U7.2 58.936,53.019 58.936,57.361 U7.5
NetU7_3: U7.3 U8.14 | length 22.4
  Bottom Layer w0.254: U7.3 57.297,54.861 58.428,55.992 58.428,56.929 57.766,57.591 57.107,57.591 56.166,58.532 56.166,67.035 61.207,72.076 U8.14
NetU7_10: U7.10 U7.13 U7.14 | length 11.6
  Bottom Layer w0.254: U7.14@49.597,48.76 U7.14 U7.13 48.038,53.019 48.038,57.361 U7.10
NetU7_12: U7.12 U8.10 | length 22.4
  Bottom Layer w0.254: U7.12 49.677,54.861 48.546,55.992 48.546,56.929 49.378,57.76 50.037,57.76 53.417,61.141 53.417,70.08 U8.10
NetU9_1: U9.1 U9.2 U9.5 | length 11.5
  Bottom Layer w0.254: U9.1 U9.2 59.024,14.243 59.024,18.585 U9.5
NetU9_3: U9.3 U10.14 | length 23.7
  Bottom Layer w0.254: U9.3 57.385,16.085 58.516,17.216 58.516,18.153 57.854,18.815 57.195,18.815 54.675,21.335 54.675,27.054 U10.14
NetU9_10: U9.10 U9.13 U9.14 | length 11.6
  Bottom Layer w0.254: U9.14@49.685,9.984 U9.14 U9.13 48.126,14.243 48.126,18.478 49.765,20.117 U9.10
NetU9_12: U9.12 U10.10 | length 22.4
  Bottom Layer w0.254: U9.12 49.765,16.085 48.634,17.216 48.634,18.153 49.466,18.984 50.125,18.984 53.505,22.365 53.505,31.304 U10.10
PWM_0: U1.3 U11.11 | length 60.9
  Top Layer w0.254: U11.11 14.974,96.818 19.392,96.818 20.332,97.759 20.332,98.418 20.995,99.08 27.012,99.08 27.674,98.418 27.674,96.274 25.412,94.012 25.412,87.392 29.614,83.19 55.06,83.19 U1.3
PWM_1: U1.10 U11.12 | length 54.7
  Top Layer w0.254: U11.12 12.434,99.08 19.336,99.08 20.352,100.096 52.453,100.096 57.669,94.88 57.669,94.222 58.472,93.419 59.931,93.419 U1.10
RST: K5.5 K8.2 R22.1 U11.1 | length 38.4
  Top Layer w0.254: K8.2 32.54,89 40.646,89 R22.1
  Bottom Layer w0.254: K5.5 21.509,82.871 21.509,79.642 22.172,78.979 23.109,78.979 24.049,79.92 24.049,80.579 30.271,86.8 K8.2 ; U11.1 42.016,95.176 R22.1
SCK: K5.3 U4.4 U6.4 U8.4 U10.4 U11.19 | length 128.8
  Top Layer w0.254: U4.4 18.969,78.979 18.969,75.499 16.429,72.959 16.429,66.199 18.161,64.467 18.161,42.639 19.582,41.218 U6.4 21.324,40.087 25.742,40.087 26.404,40.75 26.404,41.848 26.981,42.425 49.064,42.425 50.004,41.485 50.004,40.826 50.667,40.163 52.544,40.163 U10.4 54.806,40.163
  Bottom Layer w0.254: U11.19 17.27,89.442 17.27,84.57 K5.3 20.1,81.74 U4.4 21.739,78.471 42.106,78.471 44.836,81.201 51.612,81.201 52.743,80.07 U8.4
pads on no net: U2.12 U2.13 U2.14 U4.2 U4.6 U4.7 U6.2 U6.6 U6.7 U8.2 U8.6 U8.7 U10.2 U10.6 U10.7 U11.3 U11.13 U11.15 U11.16
copper on no net: | length 0.3
  Bottom Layer w0.254: 15.84,59.04 16.19,59.04

## Polygon pours and split planes (outlines as drawn)
GND on Bottom Layer "GND Plane" (solid, remove dead copper, pour order 3): 0,0 0.09,0.106 70.1,0.106 70.1,109.575 69.739,110 0,110
GND on Top Layer "GND" (solid, pour order 4): 0,109.887 0,0.106 70.01,0.106 70.1,0 70.1,110.1

## Silkscreen, mask and mechanical layers (free items; w line width, h text height)
Top Overlay:
  text "MIDI" at 10.6,83.4 h3 r90

## Text inside footprints (layer, text, board x,y; h text height)
J1: Bottom Overlay "MIDI-CV CONVERTER" at 57.4,48.7 h4.95; Bottom Overlay "GARY" at 56.9,53.1 h20